# Altium PCB ESP_FINAL.PcbDoc
Units mm, origin at the board's own origin, x right, y up, seen from the top; angles counter-clockwise.
Board outline 63.3 x 39.85 mm, 4 copper layers (L1 (Signal), L2 (GND), L3(3.3V), L4 (Signal)), stack 1.57 mm thick; 68 components, 43 nets, 280 pads, 97 vias.
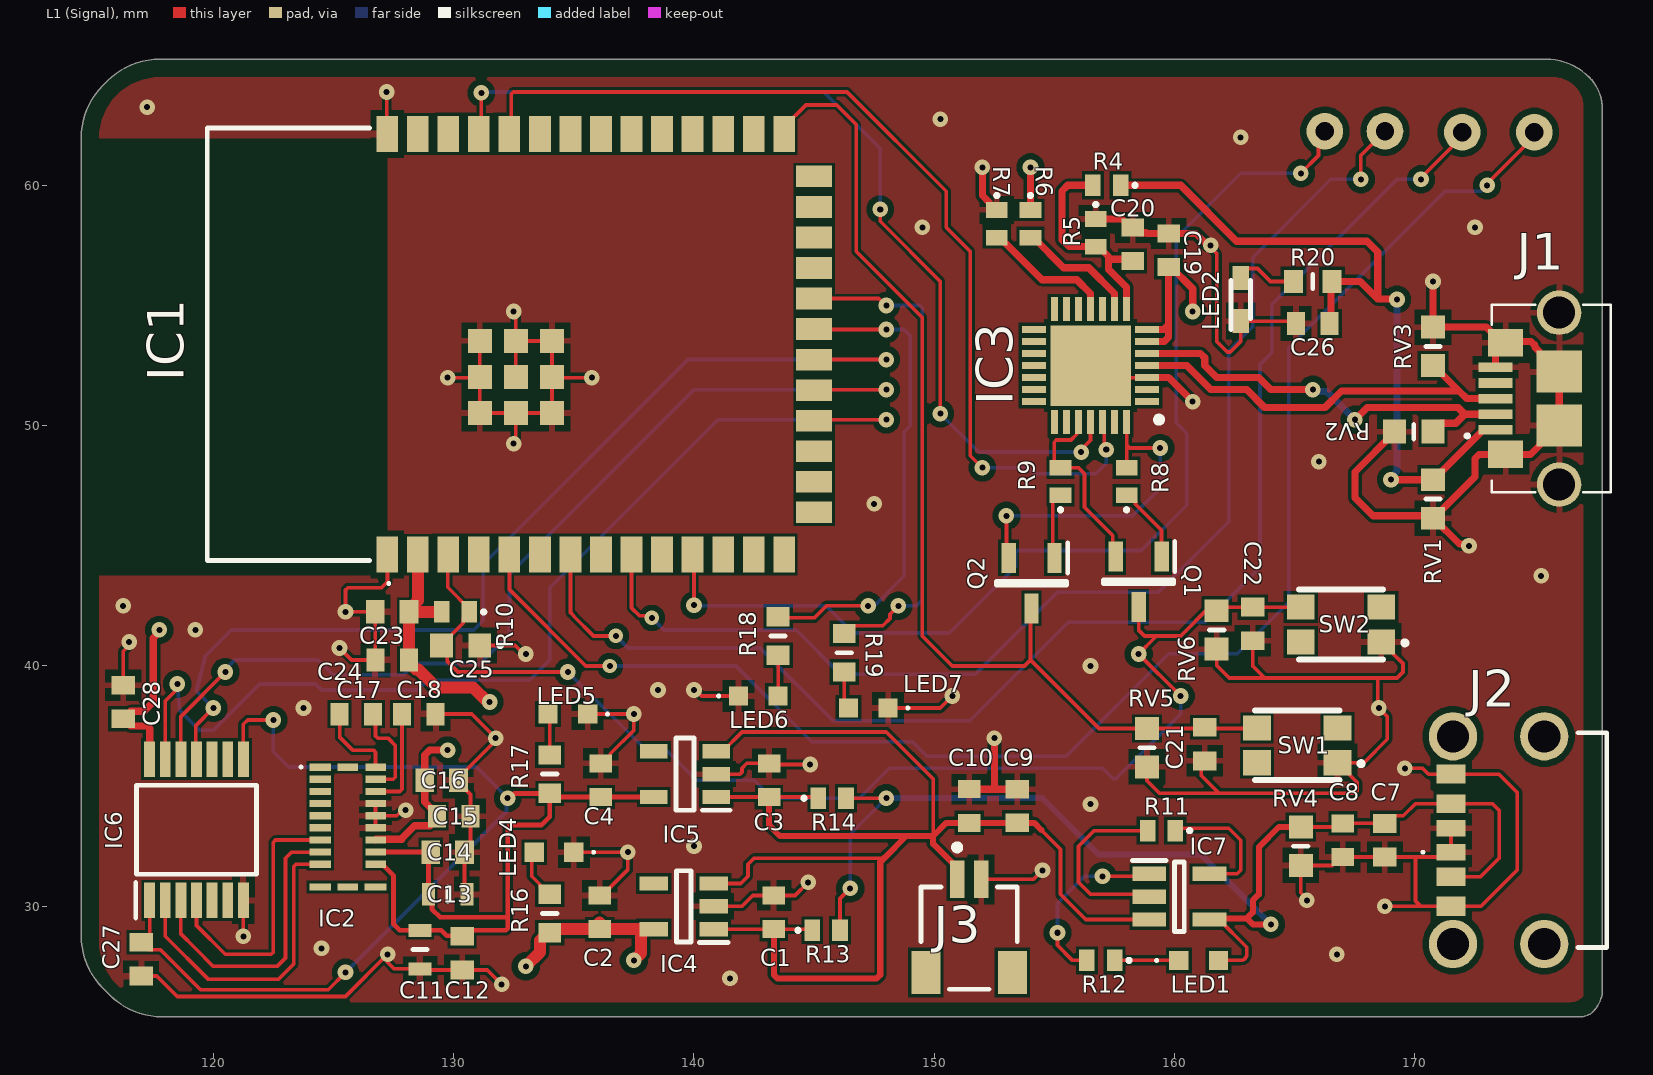
[diagram p0: L1 (Signal) view]
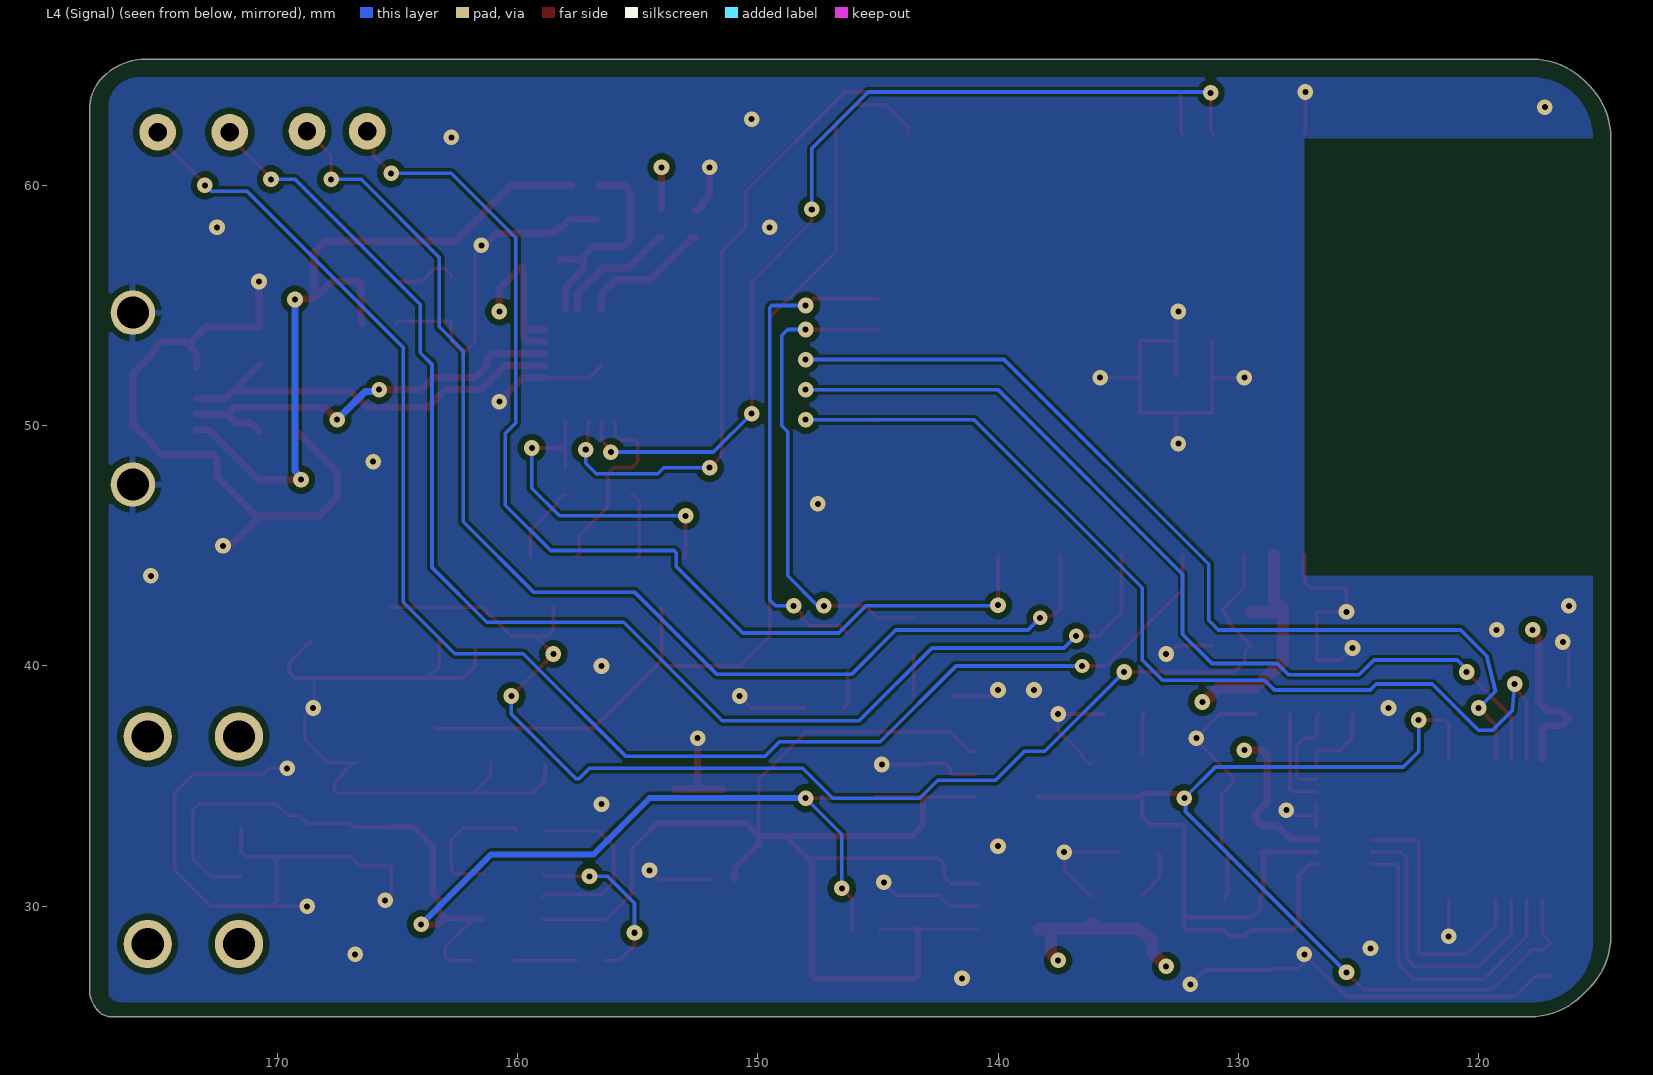
[diagram p1: L4 (Signal) view, seen from below]
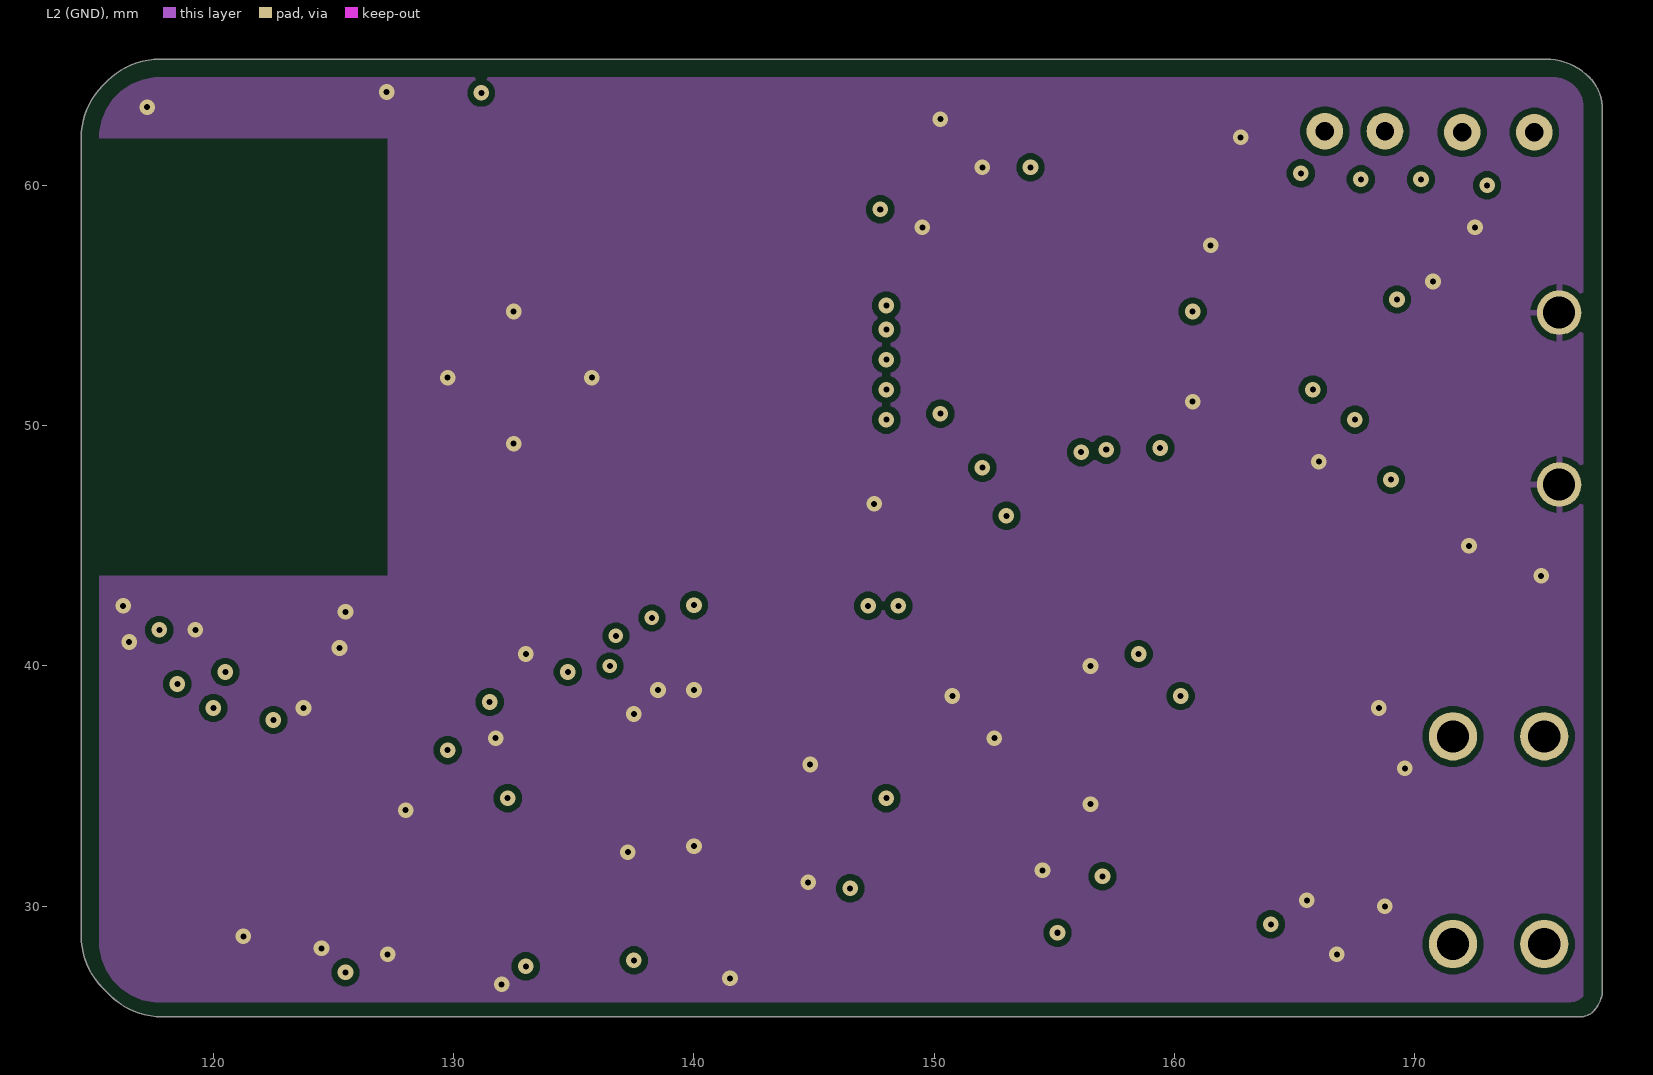
[diagram p2: L2 (GND)]
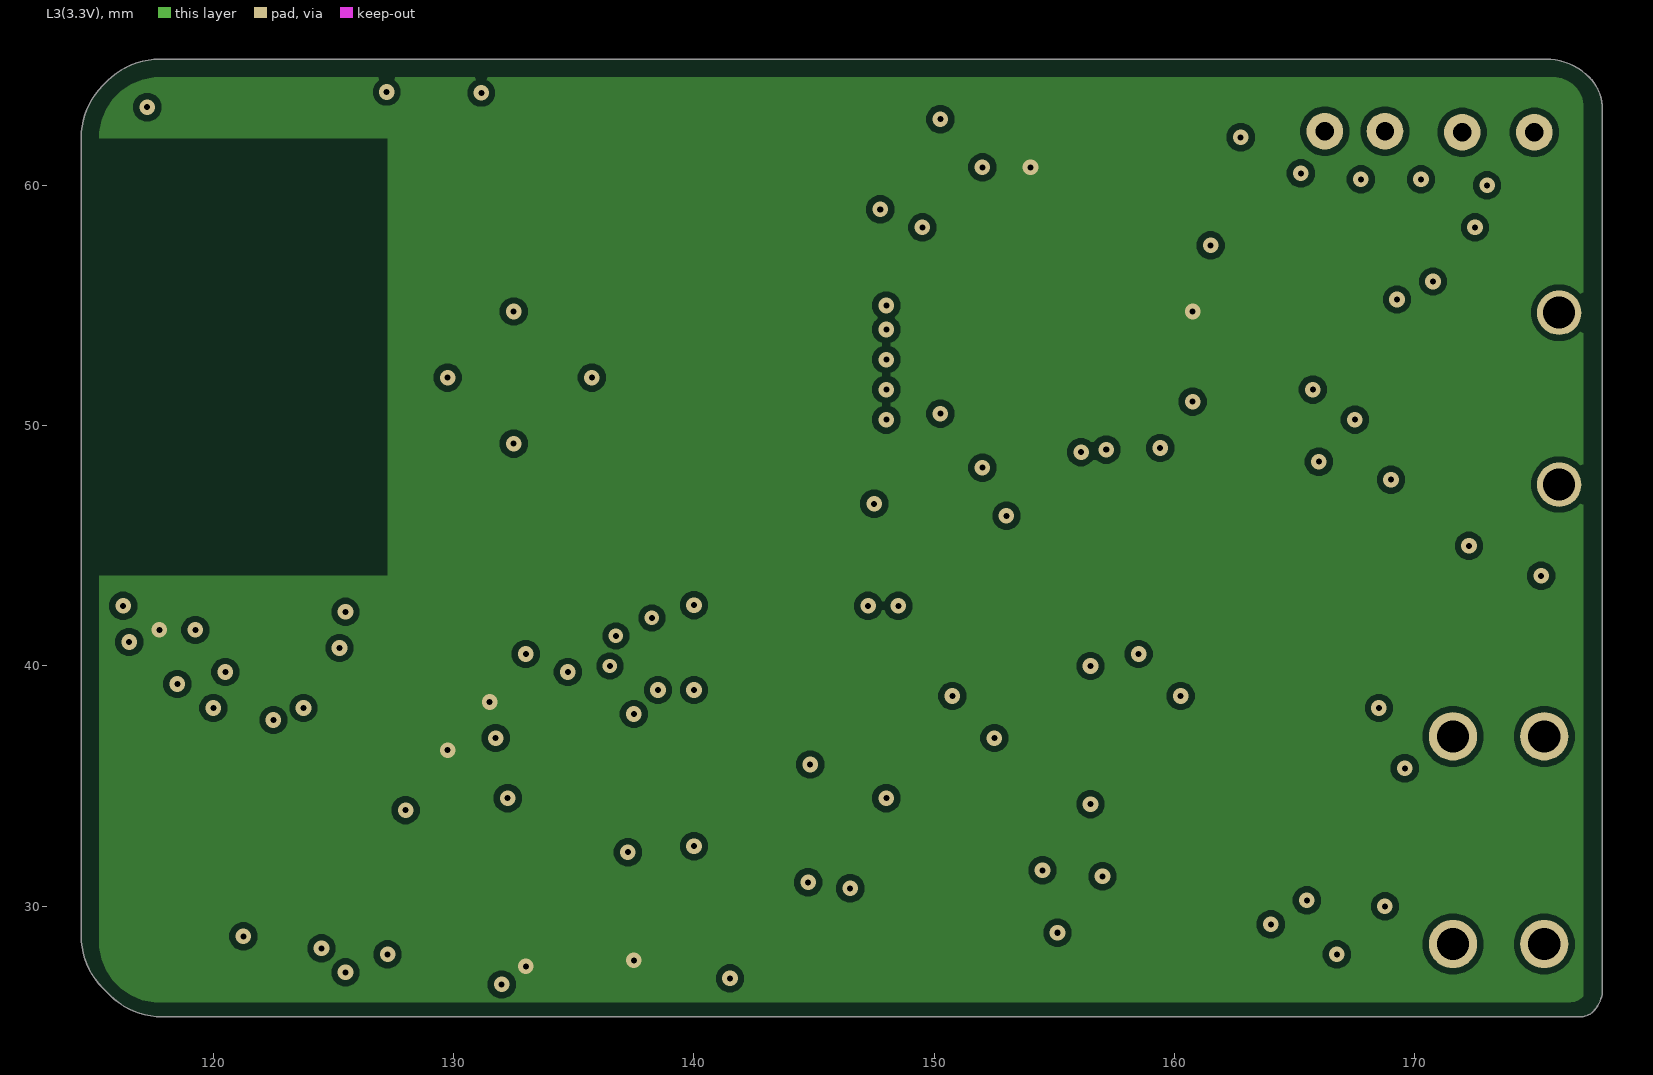
[diagram p3: L3(3.3V)]
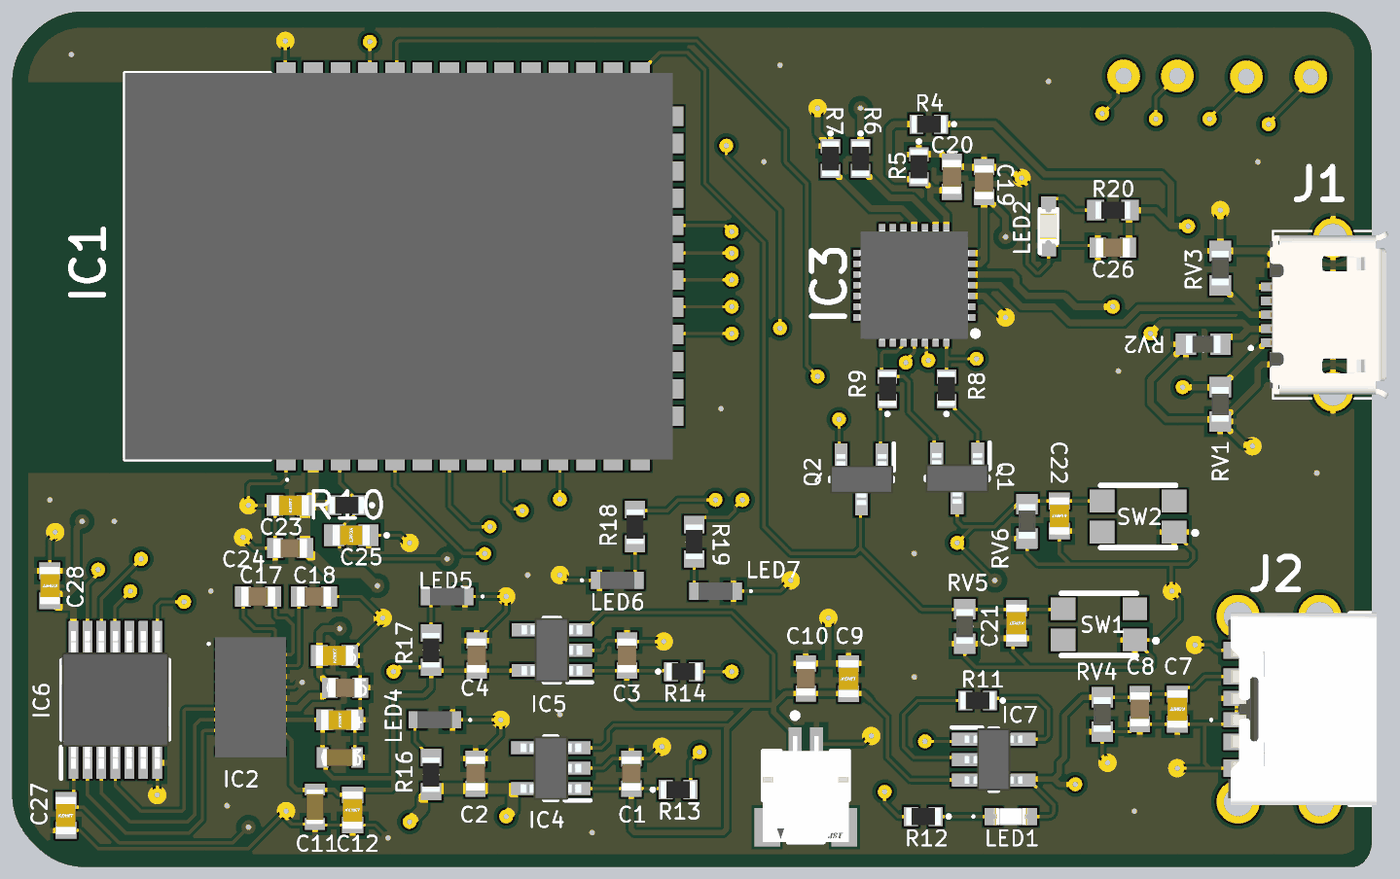
[diagram p4: 3D render of the assembled board from above, using the file's embedded part models]

## Layer stack, top to bottom
Top Solder: solder mask 0.0254, SM-001, Dk 4
L1 (Signal): signal copper 0.035
Dielectric 1: prepreg 0.2, PP-017, Dk 4.6
L2 (GND): signal copper 0.0175
Dielectric 3: core 1.065, Core-039, Dk 4.6
L3(3.3V): signal copper 0.0175
Dielectric 5: prepreg 0.2, PP-017, Dk 4.6
L4 (Signal): signal copper 0.035
Bottom Solder: solder mask 0.0254, SM-001, Dk 4

## Board outline
114.5,28.77 ccw(c117.566,28.77) 115.398,26.602 115.702,26.298 ccw(c117.87,28.466) 117.87,25.4 176.884,25.4 ccw(c176.884,26.151) 177.415,25.62 ccw(c176.485,26.55) 177.8,26.55 177.8,63.172 ccw(c175.922,63.172) 177.25,64.5 ccw(c175.439,62.689) 175.439,65.25 117.77,65.25 ccw(c117.77,62.184) 115.602,64.352 115.398,64.148 ccw(c117.566,61.98) 114.5,61.98

## Design rules (kind name [scope] priority, off if disabled: settings)
Clearance RF_Clearance [InNetClass('RF')] p1: gap=0.254 ignorepadtopadclearanceinfootprint=FALSE except(0: Arc-Hole Track-Hole SMDPad-Hole THPad-Hole Via-Hole Fill-Hole Poly-Hole Region-Hole Text-Hole; 0.127: Arc-Arc Arc-Track Arc-SMDPad Arc-Fill Arc-Region Track-Track Track-SMDPad Track-Fill Track-Region SMDPad-SMDPad SMDPad-THPad SMDPad-Fill SMDPad-Region Fill-Fill Fill-Region Region-Region; 0.33: Arc-THPad Track-THPad; 0.54: THPad-THPad; 0.88: Arc-Poly Track-Poly SMDPad-Poly THPad-Poly Via-Poly Fill-Poly Poly-Poly Poly-Region Poly-Text)
Clearance [All] p2: gap=0.127 ignorepadtopadclearanceinfootprint=FALSE except(0: Arc-Hole Track-Hole SMDPad-Hole THPad-Hole Via-Hole Fill-Hole Poly-Hole Region-Hole Text-Hole; 0.254: Arc-Via Arc-Text Track-Via Track-Text SMDPad-Text THPad-Via THPad-Fill THPad-Poly THPad-Region THPad-Text Via-Via Via-Fill Via-Poly Via-Region Via-Text Fill-Text Poly-Text Region-Text Text-Text; 0.33: Arc-THPad Track-THPad; 0.54: THPad-THPad)
ComponentClearance [All] p1 off: gap=0.254 collisioncheckmode=3 verticalgap=0.254 showdistances=FALSE
DiffPairsRouting [All] p1: maxlimit=0.254 minlimit=0.089 mostfreqgap=0.254 toplayer_prefgap=0.127 toplayer_minwidth=0.089 toplayer_maxwidth=0.381 toplayer_prefwidth=0.127 midlayer1_mingap=0.254 midlayer1_minwidth=0.381 midlayer1_maxwidth=0.381 midlayer1_prefwidth=0.381 midlayer2_mingap=0.254 midlayer2_minwidth=0.381 midlayer2_maxwidth=0.381 midlayer2_prefwidth=0.381 bottomlayer_prefgap=0.127 bottomlayer_minwidth=0.089 bottomlayer_maxwidth=0.381 bottomlayer_prefwidth=0.127 maxuncoupledlength=12.7
HoleSize [All] p1: absolutevalues=TRUE maxlimit=6.35 minlimit=0.02 maxpercent=80.000 minpercent=20.000
MinimumAnnularRing [All] p1: minimumring=0.13
MinimumSolderMaskSliver [All] p1: minsoldermaskwidth=0.2
PlaneConnect [All] p1: planeconnectstyle=Direct reliefexpansion=0.508 reliefentries=4 reliefconductorwidth=0.254 reliefairgap=0.254
PolygonConnect PolygonConnect_Via [IsVia] p1: connectstyle=Direct reliefconductorwidth=0.254 reliefentries=4 polygonreliefangle="90 Angle" airgapwidth=0.254
PolygonConnect [All] p2: connectstyle=Relief reliefconductorwidth=0.254 reliefentries=4 polygonreliefangle="90 Angle" airgapwidth=0.254
RoutingVias [All] p1: holewidth=0.2 width=0.4 viastyle="Through Hole" minholewidth=0.2 minwidth=0.4 maxholewidth=6.3 maxwidth=7
SilkToSilkClearance [All] p1: silktosilkclearance=0.15
SilkToSolderMaskClearance [IsPad] p1: minsilkscreentomaskgap=0.15 clearancetoexposedcopper=TRUE
SolderMaskExpansion [All] p1: expansion=0.102 istentingtop=FALSE
Width [All] p1: maxlimit=2.54 minlimit=0.089 preferedwidth=0.254 toplayer_prefwidth=0.152 midlayer1_minwidth=0.127 midlayer1_maxwidth=1.27 midlayer2_minwidth=0.127 midlayer2_maxwidth=1.27 bottomlayer_prefwidth=0.152 minimp=50.000000 maximp=50.000000 favimp=50.000000
23 further rules are at their usual default settings.

## Classes and differential pairs
differential pair USB_D: +USB_D_P -USB_D_N

## Components (designator, comment, footprint, x,y, rotation, side; value= is the part's Value field where it differs from the comment)
C1 "CGA3E1X7R1C105K080AC" CAPC1608X90N 143.325,29.75 r90 top
C2 "GRM188R71A225KE15J" CAPC1608X90N 136.075,29.75 r270 top
C3 "CGA3E1X7R1C105K080AC" CAPC1608X90N 143.125,35.25 r90 top
C4 "CGA3E1X7R1C105K080AC" CAPC1608X90N 136.125,35.25 r90 top
C7 "C0603C104K8RAC" CAPC1608X95N 168.75,32.75 r90 top
C8 "GRM188R61E106KA73J" CAPC1608X90N 167,32.75 r90 top
C9 "C0603C104K8RAC" CAPC1608X95N 153.45,34.175 r270 top
C10 "GRM188R61E106KA73J" CAPC1608X90N 151.45,34.175 r270 top
C11 "C1608X5R1E475K080AC" CAPC1608X80N 128.6,28.2 r270 top
C12 "C0603C104K8RAC" CAPC1608X95N 130.35,28.05 r270 top
C13 "C1608X5R1E475K080AC" CAPC1608X80N 129.75,30.5 r0 top
C14 "C0603C104K8RAC" CAPC1608X95N 129.75,32.25 r0 top
C15 "GRM188R61E106KA73J" CAPC1608X90N 130,33.75 r0 top
C16 "C0603C104K8RAC" CAPC1608X95N 129.5,35.25 r0 top
C17 "CGA3E1X7R1C105K080AC" CAPC1608X90N 125.95,38 r0 top
C18 "CGA3E1X7R1C105K080AC" CAPC1608X90N 128.55,38 r0 top
C19 "GRM188R61E106MA73J" CAPC1608X90N 159.75,57.3 r270 top
C20 "GRT188R61C105KE13D" CAPC1608X90N 158.25,57.55 r270 top
C21 "C0603C104K5RAC3121" CAPC1608X95N 161.25,36.75 r90 top
C22 "C0603C104K5RAC3121" CAPC1608X95N 163.25,41.75 r90 top
C23 "C0603C104K8RAC" CAPC1608X95N 127.44,42.25 r0 top
C24 "GRM188R61E106KA73J" CAPC1608X90N 127.44,40.25 r0 top
C25 "C0603C105K4RACTU" C0603 130.287,40.85 r180 top
C26 "GRM188R61E106MA73J" CAPC1608X90N 165.75,54.25 r0 top
C27 "C0603C104K8RAC" CAPC1608X95N 117,27.8 r270 top
C28 "C0603C104K8RAC" CAPC1608X95N 116.25,38.5 r90 top
IC1 "ESP32-S3-WROOM-2-N32R8V" ESP32S3WROOM2N32R8V 132.5,53.385 r90 top
IC2 "MAX86150EFF+T" MAX86150EFFT 125.6,33.295 r0 top
IC3 "CP2102N-A02-GQFN28" QFN50P500X500X80-29N-D 156.5,52.5 r180 top
IC4 "AP2112K-3.3TRG1" SOT95P282X130-5N 139.575,30 r180 top
IC5 "AP2112K-1.8TRG1" SOT95P285X140-5N 139.625,35.5 r180 top
IC6 "TXS0104EQPWRQ1" SOP65P640X120-14N 119.3,33.188 r90 top
IC7 "MCP73812T-420I_OT" SOT95P270X145-5N 160.2,30.4 r0 top
J1 "USB3075-30-A" USB307530A 176,51.125 r90 top
J2 "USB4125-GF-A-0190" USB4125GFA0190 174.58,32.75 r90 top
J3 "SM02B-SRSS-TB (LF)(SN)" FP-SM02B-SRSS-TB_LF_SN-MFG 151.45,28.675 r0 top
LED1 "CSL1901UW1" CSL1901UW1 161,27.75 r0 top
LED2 "SMLD12BN1WT86" LEDM168X65N 162.75,55.25 r90 top
LED4 "CSL1901YW1" CSL1901YW1 134.175,32.25 r90 top
LED5 "CSL1901YW1" CSL1901YW1 134.75,38 r90 top
LED6 "CSL1901YW1" CSL1901YW1 142.675,38.75 r270 top
LED7 "CSL1901YW1" CSL1901YW1 147.25,38.25 r90 top
Q1 "KSC3265YMTF" SOT96P237X111-3N 158.5,43.5 r270 top
Q2 "KSC3265YMTF" SOT96P237X111-3N 154.045,43.45 r270 top
R4 "ERJUP3F2212V" ERJUP3 157.175,60 r180 top
R5 "ERJUP3F4752V" ERJUP3 156.718,58.025 r270 top
R6 "ERJUP3F1001V" ERJUP3 154,58.401 r270 top
R7 "ERJ-UP3J103V" ERJUP3 152.6,58.401 r270 top
R8 "ERJ-UP3J103V" ERJUP3 158,47.675 r90 top
R9 "ERJ-UP3J103V" ERJUP3 155.25,47.675 r90 top
R10 "ERJ-UP3J103V" ERJUP3 130.075,42.25 r180 top
R11 "ERJUP3F2001V" ERJUP3 159.45,33.15 r180 top
R12 "ERJUP3F1001V" ERJUP3 156.925,27.75 r180 top
R13 "ERA-3AEB101V" ERJUP3 145.5,29 r0 top
R14 "ERA-3AEB101V" ERJUP3 145.75,34.5 r0 top
R16 "RT0603BRE075KL" RESC1608X55N 134,29.7 r90 top
R17 "RT0603BRE075KL" RESC1608X55N 134,35.5 r90 top
R18 "RT0603BRE075KL" RESC1608X55N 143.5,41.25 r270 top
R19 "RT0603BRE075KL" RESC1608X55N 146.25,40.55 r270 top
R20 "RT0603BRE075KL" RESC1608X55N 165.75,56 r180 top
RV1 "CG0603MLC-05E" VARC1608X55N 170.75,46.95 r90 top
RV2 "CG0603MLC-05E" VARC1608X55N 169.95,49.75 r0 top
RV3 "CG0603MLC-05E" VARC1608X55N 170.75,53.3 r270 top
RV4 "CG0603MLC-05E" VARC1608X55N 165.25,32.5 r90 top
RV5 "CG0603MLC-05E" VARC1608X55N 158.85,36.6 r90 top
RV6 "CG0603MLC-05E" VARC1608X55N 161.75,41.5 r90 top
SW1 "EVP-AA402WL" EVPAA 165.1,36.7 r180 top
SW2 "EVP-AA402WL" EVPAA 166.925,41.725 r180 top

## Footprints (in the part's own frame and the unit in brackets; to place one, negate y for a bottom-side part, rotate by r counter-clockwise, add the part's x,y. Pads: shape width x height; smd on the part's side, far side on the other; paste and mask are expansions set on the pad)
C0603 [mm]
  rect 0.95x1 smd: 1(-0.8,0) 2(0.8,0)
  silkscreen extent -1.7,-0.05 -1.6,0.05, body extent -0.87,-0.48 0.88,0.47, height 0.87
CAPC1608X80N [mm]
  rect 0.54x0.94 smd: 1(-0.8,0) 2(0.8,0)
  silkscreen extent 0,-0.3 0,0.3, body extent -0.8,-0.4 0.8,0.4, height 0.8
CAPC1608X90N [mm]
  rect 0.75x0.94 smd: 1(-0.7,0) 2(0.7,0)
  body extent -0.8,-0.45 0.8,0.45, height 0.8
CAPC1608X95N [mm]
  rect 0.78x0.98 smd: 1(-0.7,0) 2(0.7,0)
  body extent -0.87,-0.48 0.88,0.47, height 0.87
CSL1901UW1 [mm]
  rect 0.8x0.8 smd: 1(-0.825,0) 2(0.825,0)
  silkscreen extent -1.8,-0.05 -1.7,0.05, body extent -0.8,-0.4 0.8,0.4, height 0.55
CSL1901YW1 [mm]
  rect 0.8x0.8 smd: 1(0,-0.825) 2(0,0.825)
  silkscreen extent -0.05,-1.7 0.05,-1.6, body extent -0.4,-0.8 0.4,0.8, height 0.75
ERJUP3 [mm]
  rect 0.65x0.9 smd: 1(-0.575,0) 2(0.575,0)
  silkscreen extent -1.22,-0.05 -1.13,0.05, body extent -0.8,-0.4 0.8,0.4, height 0.55
ESP32S3WROOM2N32R8V [mm]
  rect 1.5x0.9 smd: 1(-8.75,5.26) 2(-8.75,3.99) 3(-8.75,2.72) 4(-8.75,1.45) 5(-8.75,0.18) 6(-8.75,-1.09) 7(-8.75,-2.36) 8(-8.75,-3.63) 9(-8.75,-4.9) 10(-8.75,-6.17) 11(-8.75,-7.44) 12(-8.75,-8.71) 13(-8.75,-9.98) 14(-8.75,-11.25) 27(8.75,-11.25) 28(8.75,-9.98) 29(8.75,-8.71) 30(8.75,-7.44) 31(8.75,-6.17) 32(8.75,-4.9) 33(8.75,-3.63) 34(8.75,-2.36) 35(8.75,-1.09) 36(8.75,0.18) 37(8.75,1.45) 38(8.75,2.72) 39(8.75,3.99) 40(8.75,5.26)
  rect 0.9x1.5 smd: 15(-6.985,-12.5) 16(-5.715,-12.5) 17(-4.445,-12.5) 18(-3.175,-12.5) 19(-1.905,-12.5) 20(-0.635,-12.5) 21(0.635,-12.5) 22(1.905,-12.5) 23(3.175,-12.5) 24(4.445,-12.5) 25(5.715,-12.5) 26(6.985,-12.5)
  rect 1x1 smd: 41(-1.36,-0.09) 42(-1.36,1.41) 43(-2.86,1.41) 44(-2.86,-0.09) 45(-2.86,-1.59) 46(-1.36,-1.59) 47(0.14,-1.59) 48(0.14,-0.09) 49(0.14,1.41)
  silkscreen extent -10,5.15 9,12.75, body extent -9,-12.75 9,12.75, height 3.35
EVPAA [mm]
  rect 1.15x1.05 smd: 1(-1.675,0.725) 2(-1.675,-0.725) 3(1.675,0.725) 4(1.675,-0.725)
  silkscreen extent -2.71,-1.45 1.75,1.45
FP-SM02B-SRSS-TB_LF_SN-MFG [mm]
  rect 0.6x1.55 smd paste+0 mask+0: 1(-0.5,2.45) 2(0.5,2.45)
  rect 1.2x1.8 smd paste+0 mask+0: 3(-1.8,-1.425) 4(1.8,-1.425)
  silkscreen extent -2,-2.12 2,3.9, body extent -2.5,-2.42 2.5,3.32, height 0.25
LEDM168X65N [mm]
  rect 1x0.7 smd: 1(-0.9,0) 2(0.9,0)
  silkscreen extent -1.25,-0.4 0.8,0.4, body extent -0.8,-0.4 0.8,0.4, height 0.55
MAX86150EFFT [mm]
  rect 0.9x0.3 smd: 1(-1.15,2.495) 2(-1.15,1.99) 3(-1.15,1.485) 4(-1.15,0.98) 5(-1.15,0.475) 6(-1.15,-0.03) 7(-1.15,-0.535) 8(-1.15,-1.04) 9(-1.15,-1.545) 10(-1.15,-2.495) 12(1.15,-2.495)
  rect 0.85x0.3 smd: 11(0,-2.495) 13(1.15,-1.545) 14(1.15,-1.04) 15(1.15,-0.535) 16(1.15,-0.03) 17(1.15,0.475) 18(1.15,0.98) 19(1.15,1.485) 20(1.15,1.99) 21(1.15,2.495) 22(0,2.495)
  silkscreen extent -2,2.45 -1.9,2.55, body extent -1.65,-2.8 1.65,2.8, height 1.5
QFN50P500X500X80-29N-D [mm]
  rect 1x0.3 smd: 1(-2.35,1.5) 2(-2.35,1) 3(-2.35,0.5) 4(-2.35,0) 5(-2.35,-0.5) 6(-2.35,-1) 7(-2.35,-1.5) 15(2.35,-1.5) 16(2.35,-1) 17(2.35,-0.5) 18(2.35,0) 19(2.35,0.5) 20(2.35,1) 21(2.35,1.5)
  rect 0.3x1 smd: 8(-1.5,-2.35) 9(-1,-2.35) 10(-0.5,-2.35) 11(0,-2.35) 12(0.5,-2.35) 13(1,-2.35) 14(1.5,-2.35) 22(1.5,2.35) 23(1,2.35) 24(0.5,2.35) 25(0,2.35) 26(-0.5,2.35) 27(-1,2.35) 28(-1.5,2.35)
  rect 3.35x3.35 smd: 29(0,0)
  silkscreen extent -2.98,2.13 -2.73,2.37, body extent -2.55,-2.55 2.55,2.55, height 0.8
RESC1608X55N [mm]
  rect 0.8x0.95 smd: 1(-0.8,0) 2(0.8,0)
  silkscreen extent 0,-0.3 0,0.3, body extent -0.8,-0.4 0.8,0.4, height 0.55
SOP65P640X120-14N [mm]
  rect 1.475x0.45 smd: 1(-2.938,1.95) 2(-2.938,1.3) 3(-2.938,0.65) 4(-2.938,0) 5(-2.938,-0.65) 6(-2.938,-1.3) 7(-2.938,-1.95) 8(2.938,-1.95) 9(2.938,-1.3) 10(2.938,-0.65) 11(2.938,0) 12(2.938,0.65) 13(2.938,1.3) 14(2.938,1.95)
  silkscreen extent -3.67,-2.5 1.85,2.52, body extent -3.21,-2.5 3.21,2.5, height 1
SOT95P270X145-5N [mm]
  rect 1.4x0.6 smd: 1(-1.25,0.95) 2(-1.25,0) 3(-1.25,-0.95) 4(1.25,-0.95) 5(1.25,0.95)
  silkscreen extent -1.95,-1.45 0.2,1.5, body extent -1.35,-1.45 1.35,1.45, height 1.45
SOT95P282X130-5N [mm]
  rect 1.2x0.6 smd: 1(-1.25,0.95) 2(-1.25,0) 3(-1.25,-0.95) 4(1.25,-0.95) 5(1.25,0.95)
  silkscreen extent -1.85,-1.48 0.3,1.5, body extent -1.41,-1.48 1.41,1.48, height 1.3
SOT95P285X140-5N [mm]
  rect 1.15x0.6 smd: 1(-1.3,0.95) 2(-1.3,0) 3(-1.3,-0.95) 4(1.3,-0.95) 5(1.3,0.95)
  silkscreen extent -1.88,-1.5 0.38,1.5, body extent -1.43,-1.5 1.43,1.5, height 1.4
SOT96P237X111-3N [mm]
  rect 1.25x0.6 smd: 1(-1.05,0.955) 2(-1.05,-0.955) 3(1.05,0)
  silkscreen extent -1.68,-1.46 0.08,1.51, body extent -1.18,-1.46 1.18,1.46, height 1.11
USB4125GFA0190 [mm]
  rect 0.7x1.2 smd: A5(-0.5,3.08) B5(0.5,3.08)
  rect 0.76x1.2 smd: A9(1.52,3.08) B9(-1.52,3.08)
  rect 0.8x1.2 smd: A12(2.75,3.08) B12(-2.75,3.08)
  round 2.01 hole 1.34: MH1(-4.32,3) MH2(-4.32,-0.8) MH3(4.32,-0.8) MH4(4.32,3)
  silkscreen extent -4.47,-3.4 4.47,4.3, body extent -4.47,-3.45 4.47,3.45, height 3.26
USB307530A [mm]
  rect 0.4x1.4 smd: 1(-1.3,2.65) 2(-0.65,2.65) 3(0,2.65) 4(0.65,2.65) 5(1.3,2.65)
  round 1.85 hole 1.328: MH1(-3.575,0) MH2(3.575,0)
  rect 1.75x1.9 smd: MP1(-1.125,0) MP2(1.125,0)
  rect 1.15x1.45 smd: MP3(-2.32,2.23) MP4(2.32,2.23)
  silkscreen extent -3.9,-2.15 3.9,3.87, body extent -3.9,-2.6 3.9,2.94, height 2.56
VARC1608X55N [mm]
  rect 0.95x1 smd: 1(-0.8,0) 2(0.8,0)
  silkscreen extent 0,-0.3 0,0.3, body extent -0.8,-0.4 0.8,0.4, height 0.55

## Part data
C1 C3 C4 C17 C18: "Capacitor", Manufacturer_Name=TDK, Mouser Part Number=810-CGA3E1X7R1C105AC, Arrow Part Number=CGA3E1X7R1C105K080AC, Arrow Price/Stock=https://www.arrow.com/en/products/cga3e1x7r1c105k080ac/tdk?region=nac, Datasheet Link=http://docs-europe.electrocomponents.com/webdocs/14e9/0900766b814e9125.pdf, Height=0.9mm, Manufacturer_Part_Number=CGA3E1X7R1C105K080AC, Mouser Price/Stock=https://www.mouser.co.uk/ProductDetail/TDK/CGA3E1X7R1C105K080AC?qs=XHchNesRtUbBVNsGg9%252BP9g%3D%3D
C2: "Capacitor", Manufacturer_Name="Murata Electronics", Mouser Part Number=81-GRM188R71A225KE5J, Arrow Part Number=GRM188R71A225KE15J, Arrow Price/Stock=https://www.arrow.com/en/products/grm188r71a225ke15j/murata-manufacturing?region=nac, Datasheet Link=https://psearch.en.murata.com/capacitor/product/GRM188R71A225KE15%23.html, Height=0.9mm, Manufacturer_Part_Number=GRM188R71A225KE15J, Mouser Price/Stock=https://www.mouser.co.uk/ProductDetail/Murata-Electronics/GRM188R71A225KE15J?qs=UOvNgVTuGCp28jccFPFZuA%3D%3D
C7 C9 C12 C14 C16 C23 C27 C28: "Capacitor", Manufacturer_Name=KEMET, Mouser Part Number=80-C0603C104K8RAC, Arrow Part Number=C0603C104K8RAC, Arrow Price/Stock=https://www.arrow.com/en/products/c0603c104k8rac/kemet-corporation?region=nac, Datasheet Link=https://www.kemet.com/specsheet/C0603C104K8RAC%7BBULK%7D, Height=0.95mm, Manufacturer_Part_Number=C0603C104K8RAC, Mouser Price/Stock=https://www.mouser.co.uk/ProductDetail/KEMET/C0603C104K8RAC?qs=JxH5GSBHSCStdUs4AtW0Gg%3D%3D
C8 C10 C15 C24: "Capacitor", Manufacturer_Name="Murata Electronics", Mouser Part Number=81-GRM188R61E106KA3J, Arrow Part Number=GRM188R61E106KA73J, Arrow Price/Stock=https://www.arrow.com/en/products/grm188r61e106ka73j/murata-manufacturing?region=nac, Height=0.9mm, Manufacturer_Part_Number=GRM188R61E106KA73J, Mouser Price/Stock=https://www.mouser.co.uk/ProductDetail/Murata-Electronics/GRM188R61E106KA73J?qs=5aG0NVq1C4xEV8YyiSS7mg%3D%3D
C11 C13: "Capacitor", Manufacturer_Name=TDK, Mouser Part Number=810-C1608X5R1E475K, Arrow Part Number=C1608X5R1E475K080AC, Arrow Price/Stock=https://www.arrow.com/en/products/c1608x5r1e475k080ac/tdk?region=nac, Datasheet Link=https://product.tdk.com/info/en/catalog/datasheets/mlcc_commercial_midvoltage_en.pdf, Height=0.8mm, Manufacturer_Part_Number=C1608X5R1E475K080AC, Mouser Price/Stock=https://www.mouser.co.uk/ProductDetail/TDK/C1608X5R1E475K080AC?qs=dfay7wIA1uHUGZGvnFtOyQ%3D%3D
C19 C26: "Capacitor", Manufacturer_Name="Murata Electronics", Mouser Part Number=81-GRM188R61E106MA3J, Arrow Part Number=GRM188R61E106MA73J, Arrow Price/Stock=https://www.arrow.com/en/products/grm188r61e106ma73j/murata-manufacturing?region=nac, Datasheet Link=https://psearch.en.murata.com/capacitor/product/GRM188R61E106MA73%23.html, Height=0.9mm, Manufacturer_Part_Number=GRM188R61E106MA73J, Mouser Price/Stock=https://www.mouser.co.uk/ProductDetail/Murata-Electronics/GRM188R61E106MA73J?qs=hNud%2FORuBR2%252B%252BY67hhW1nA%3D%3D
C20: "Capacitor", Manufacturer_Name="Murata Electronics", Mouser Part Number=81-GRT188R61C105KE3D, Arrow Part Number=GRT188R61C105KE13D, Arrow Price/Stock=https://www.arrow.com/en/products/grt188r61c105ke13d/murata-manufacturing, Datasheet Link=https://psearch.en.murata.com/capacitor/product/GRT188R61C105KE13%23.html?excid=ww_pa-o_ow_ctl_c03e-9_2017, Height=0.9mm, Manufacturer_Part_Number=GRT188R61C105KE13D, Mouser Price/Stock=https://www.mouser.co.uk/ProductDetail/Murata-Electronics/GRT188R61C105KE13D?qs=drgMNd%252BkGPOepOW7YqGRfg%3D%3D
C21 C22: "Capacitor", Manufacturer_Name=KEMET, Mouser Part Number=80-C603C104K5RAC3121, Arrow Part Number=C0603C104K5RAC3121, Arrow Price/Stock=https://www.arrow.com/en/products/c0603c104k5rac3121/kemet-corporation?region=nac, Datasheet Link=https://mouser.componentsearchengine.com/Datasheets/1/C0603C104K5RAC3121.pdf, Height=0.95mm, Manufacturer_Part_Number=C0603C104K5RAC3121, Mouser Price/Stock=https://www.mouser.co.uk/ProductDetail/KEMET/C0603C104K5RAC3121?qs=oBCMsStVSxe1EkGyoyETtg%3D%3D
C25: "Capacitor", Manufacturer_Name=KEMET, Mouser Part Number=80-C0603C105K4R, Arrow Part Number=C0603C105K4RACTU, Arrow Price/Stock=https://www.arrow.com/en/products/c0603c105k4ractu/kemet-corporation?region=nac, Datasheet Link=https://content.kemet.com/datasheets/KEM_C1002_X7R_SMD.pdf, Height=0.87mm, Manufacturer_Part_Number=C0603C105K4RACTU, Mouser Price/Stock=https://www.mouser.co.uk/ProductDetail/KEMET/C0603C105K4RACTU?qs=STjISULpmtZNMAZGR4X39Q%3D%3D
IC1: "Integrated Circuit", Manufacturer_Name="Espressif Systems", Mouser Part Number=356-ESP3S3WRM2N32R8V, Datasheet Link=https://www.espressif.com/sites/default/files/documentation/esp32-s3-wroom-2_datasheet_en.pdf, Height=3.25mm, Manufacturer_Part_Number=ESP32-S3-WROOM-2-N32R8V, Mouser Price/Stock=https://www.mouser.co.uk/ProductDetail/Espressif-Systems/ESP32-S3-WROOM-2-N32R8V?qs=Li%252BoUPsLEntC3FaT%2FvCeug%3D%3D
IC2: "Integrated Circuit", Manufacturer_Name="Analog Devices", Mouser Part Number=700-MAX86150EFF+T, Arrow Part Number=MAX86150EFF+T, Arrow Price/Stock=https://www.arrow.com/en/products/max86150efft/maxim-integrated?region=nac, Datasheet Link=https://datasheets.maximintegrated.com/en/ds/MAX86150.pdf, Height=1.4mm, Manufacturer_Part_Number=MAX86150EFF+T, Mouser Price/Stock=https://www.mouser.co.uk/ProductDetail/Analog-Devices-Maxim-Integrated/MAX86150EFF%2bT?qs=CfuTe0PnivoQJnGe4c6AkQ%3D%3D
IC3: "Integrated Circuit", Manufacturer_Name="Silicon Labs", Mouser Part Number=634-CP2102NA02GQFN28, Arrow Part Number=CP2102N-A02-GQFN28, Arrow Price/Stock=https://www.arrow.com/en/products/cp2102n-a02-gqfn28/silicon-labs?region=nac, Datasheet Link=https://componentsearchengine.com/Datasheets/2/CP2102N-A02-GQFN28.pdf, Height=0.8mm, Manufacturer_Part_Number=CP2102N-A02-GQFN28, Mouser Price/Stock=https://www.mouser.co.uk/ProductDetail/Silicon-Labs/CP2102N-A02-GQFN28?qs=u16ybLDytRaSBkSkyjYFiA%3D%3D
IC4: "Integrated Circuit", Manufacturer_Name="Diodes Inc.", Mouser Part Number=621-AP2112K-3.3TRG1, Arrow Part Number=AP2112K-3.3TRG1, Arrow Price/Stock=https://www.arrow.com/en/products/ap2112k-3.3trg1/diodes-incorporated?region=nac, Datasheet Link=http://uk.rs-online.com/web/p/products/8283509, Height=1.3mm, Manufacturer_Part_Number=AP2112K-3.3TRG1, Mouser Price/Stock=https://www.mouser.co.uk/ProductDetail/Diodes-Incorporated/AP2112K-3.3TRG1?qs=x6A8l6qLYDDPYHosCdzh%2FA%3D%3D
IC5: "Integrated Circuit", Manufacturer_Name="Diodes Inc.", Mouser Part Number=621-AP2112K-1.8TRG1, Arrow Part Number=AP2112K-1.8TRG1, Arrow Price/Stock=https://www.arrow.com/en/products/ap2112k-1.8trg1/diodes-incorporated?region=nac, Datasheet Link=https://www.diodes.com/assets/Datasheets/AP2112.pdf, Height=1.4mm, Manufacturer_Part_Number=AP2112K-1.8TRG1, Mouser Price/Stock=https://www.mouser.co.uk/ProductDetail/Diodes-Incorporated/AP2112K-1.8TRG1?qs=x6A8l6qLYDBx1xhw8AX2cw%3D%3D
IC6: "Integrated Circuit", Manufacturer_Name="Texas Instruments", Mouser Part Number=595-TXS0104EQPWRQ1, Arrow Part Number=TXS0104EQPWRQ1, Arrow Price/Stock=https://www.arrow.com/en/products/txs0104eqpwrq1/texas-instruments?region=nac, Datasheet Link=http://www.ti.com/lit/gpn/txs0104e-q1, Height=1.2mm, Manufacturer_Part_Number=TXS0104EQPWRQ1, Mouser Price/Stock=https://www.mouser.co.uk/ProductDetail/Texas-Instruments/TXS0104EQPWRQ1?qs=%2Fd%252BFzHvH4c2rOFEu5n8Xkg%3D%3D
IC7: "Integrated Circuit", Arrow Part Number=MCP73812T-420I/OT, Manufacturer_Name=Microchip, Mouser Part Number=579-MCP73812T-420IOT, Arrow Price/Stock=https://www.arrow.com/en/products/mcp73812t-420iot/microchip-technology?region=nac, Datasheet Link=https://datasheet.datasheetarchive.com/originals/distributors/SFDatasheet-4/sf-00090104.pdf, Height=1.45mm, Manufacturer_Part_Number=MCP73812T-420I/OT, Mouser Price/Stock=https://www.mouser.co.uk/ProductDetail/Microchip-Technology/MCP73812T-420I-OT?qs=tZia49mH7IIojPkz8UZ7Mg%3D%3D
J1: "Connector", Manufacturer_Name="GCT (GLOBAL CONNECTOR TECHNOLOGY)", Mouser Part Number=640-USB3075-30-A, Datasheet Link=https://componentsearchengine.com/Datasheets/2/USB3075-30-A.pdf, Height=2.7mm, Manufacturer_Part_Number=USB3075-30-A, Mouser Price/Stock=https://www.mouser.co.uk/ProductDetail/GCT/USB3075-30-A?qs=KUoIvG%2F9IlbGMJplbp1ybA%3D%3D
J2: "Connector", Manufacturer_Name="GCT (GLOBAL CONNECTOR TECHNOLOGY)", Mouser Part Number=640-USB4125-GF-A-190, Datasheet Link=https://eu.mouser.com/datasheet/2/837/usb4125-2448699.pdf, Manufacturer_Part_Number=USB4125-GF-A-0190, Mouser Price/Stock=https://www.mouser.co.uk/ProductDetail/GCT/USB4125-GF-A-0190?qs=QNEnbhJQKvbCz4hEJBS24w%3D%3D
J3: library part CMP-17439-000368-1, "CONN HEADER SMD R/A 2POS 1MM", Color=Natural, Contact Resistance=40mR, Current Rating=700mA, Flammability Rating="UL94 V-0", Housing Color=Beige, Insulation Resistance=100MR, Max Current Rating=1A, Max Operating Temperature=85°C, Max Voltage Rating (AC)=50V, Min Operating Temperature=-25°C, Connector Type=Header, Contact Finish - Mating=TIN, Contact Material="Copper Alloy", Contact Plating=Tin, Contact Shape=Square, Contact Type="Male Pin", Depth=4.95mm, Fastening Type=Pull, Housing Material=Polyamide, Insulation Color=Natural, Insulation Material=Nylon, Lead Free="Lead Free", Lead Pitch=1mm, Length=4mm, Material=Polyamide, Mount="Surface Mount", Number of Contacts=2, Number of Positions=2, Number of Rows=1, Orientation="Right Angle", Packaging="Tape and Reel", Pitch=1mm, REACH SVHC="No SVHC", Series=SR, Termination=Solder, Voltage Rating=50V, Voltage Rating (AC)=50V
LED1: "LED", Manufacturer_Name="ROHM Semiconductor", Mouser Part Number=755-CSL1901UW1, Datasheet Link=https://www.mouser.kr/datasheet/2/348/csl1901uw1_e-3006038.pdf, Height=0.65mm, Manufacturer_Part_Number=CSL1901UW1, Mouser Price/Stock=https://www.mouser.co.uk/ProductDetail/ROHM-Semiconductor/CSL1901UW1?qs=vvQtp7zwQdNEDNe2oY5WlQ%3D%3D
LED2: "LED", Manufacturer_Name="ROHM Semiconductor", Mouser Part Number=755-SMLD12BN1WT86, Datasheet Link=https://datasheet.datasheetarchive.com/originals/distributors/Datasheets_SAMA/8f824a900f8c9a143b1c3640e6aee7b7.pdf, Height=0.65mm, Manufacturer_Part_Number=SMLD12BN1WT86, Mouser Price/Stock=https://www.mouser.co.uk/ProductDetail/ROHM-Semiconductor/SMLD12BN1WT86?qs=qSfuJ%252Bfl%2Fd43hcPp9hYPwA%3D%3D
LED4 LED5 LED6 LED7: "LED", Manufacturer_Name="ROHM Semiconductor", Mouser Part Number=755-CSL1901YW1, Datasheet Link=https://www.rohm.com/datasheet?p=CSL1901YW&dist=Digi-key&media=referral&source=digi-key.com&campaign=Digi-key, Height=0.65mm, Manufacturer_Part_Number=CSL1901YW1, Mouser Price/Stock=https://www.mouser.co.uk/ProductDetail/ROHM-Semiconductor/CSL1901YW1?qs=vvQtp7zwQdO0NUeC1uqWRA%3D%3D
Q1 Q2: "Transistor BJT NPN", Manufacturer_Name=onsemi, Mouser Part Number=512-KSC3265YMTF, Arrow Part Number=KSC3265YMTF, Arrow Price/Stock=https://www.arrow.com/en/products/ksc3265ymtf/on-semiconductor?region=europe, Datasheet Link=https://www.onsemi.com/pdf/datasheet/ksc3265-d.pdf, Height=1.11mm, Manufacturer_Part_Number=KSC3265YMTF, Mouser Price/Stock=https://www.mouser.co.uk/ProductDetail/onsemi-Fairchild/KSC3265YMTF?qs=ljbEvF4DwONyf%2FfRDGs9vw%3D%3D
R4 R5 R6 R11 R12: "Resistor", Manufacturer_Name=Panasonic, Datasheet Link=https://industrial.panasonic.com/cdbs/wwwdata/pdf/RDP0000/AOA0000C337.pdf, Height=0.55mm
  R4: Manufacturer_Part_Number=ERJUP3F2212V
  R5: Manufacturer_Part_Number=ERJUP3F4752V
  R6 R12: Manufacturer_Part_Number=ERJUP3F1001V
  R11: Manufacturer_Part_Number=ERJUP3F2001V
R7 R8 R9 R10: "Resistor", Manufacturer_Name=Panasonic, Mouser Part Number=667-ERJ-UP3J103V, Arrow Part Number=ERJ-UP3J103V, Arrow Price/Stock=https://www.arrow.com/en/products/erj-up3j103v/panasonic?region=nac, Datasheet Link=https://industrial.panasonic.com/cdbs/www-data/pdf/RDP0000/AOA0000C337.pdf, Height=0.55mm, Manufacturer_Part_Number=ERJ-UP3J103V, Mouser Price/Stock=https://www.mouser.co.uk/ProductDetail/Panasonic/ERJ-UP3J103V?qs=GedFDFLaBXEhCQ7XYsRS5A%3D%3D
R13 R14: "Resistor", Manufacturer_Name=Panasonic, Mouser Part Number=667-ERA-3AEB101V, Arrow Part Number=ERA-3AEB101V, Arrow Price/Stock=https://www.arrow.com/en/products/era3aeb101v/panasonic?region=nac, Datasheet Link=https://industrial.panasonic.com/cdbs/www-data/pdf/RDM0000/AOA0000C307.pdf, Height=0.55mm, Manufacturer_Part_Number=ERA-3AEB101V, Mouser Price/Stock=https://www.mouser.co.uk/ProductDetail/Panasonic/ERA-3AEB101V?qs=1VWA5LkbEaor%2FEcdBRYgKw%3D%3D
R16 R17 R18 R19 R20: "Resistor", Manufacturer_Name=KEMET, Mouser Part Number=603-RT0603BRE075KL, Arrow Part Number=RT0603BRE075KL, Arrow Price/Stock=https://www.arrow.com/en/products/rt0603bre075kl/yageo?region=nac, Datasheet Link=https://datasheet.datasheetarchive.com/originals/distributors/Datasheets_SAMA/a1f8f48f216d234b3e6a96d43a77a0c1.pdf, Height=0.55mm, Manufacturer_Part_Number=RT0603BRE075KL, Mouser Price/Stock=https://www.mouser.co.uk/ProductDetail/YAGEO/RT0603BRE075KL?qs=acBVhj9v9XV8K9glB49uvw%3D%3D
RV1 RV2 RV3 RV4 RV5 RV6: "Varistor", Manufacturer_Name=Bourns, Mouser Part Number=652-CG0603MLC-05E, Arrow Part Number=CG0603MLC-05E, Arrow Price/Stock=https://www.arrow.com/en/products/cg0603mlc-05e/bourns?region=nac, Datasheet Link=http://www.farnell.com/datasheets/1785244.pdf, Height=0.55mm, Manufacturer_Part_Number=CG0603MLC-05E, Mouser Price/Stock=https://www.mouser.co.uk/ProductDetail/Bourns/CG0603MLC-05E?qs=lDok7oSghXVLNKMK69q%252BFQ%3D%3D
SW1 SW2: "Switch", Manufacturer_Name=Panasonic, Datasheet Link=http://www.farnell.com/datasheets/2609096.pdf?_ga=2.89858395.1909122740.1531313473-167411096.1502103357, Manufacturer_Part_Number=EVP-AA402WL

## Free pads (board coordinates)
  round 1.524 hole 0.762: 2(166.25,62.25) 3(168.75,62.25) 4(171.966,62.207) 5(174.966,62.207)

## Via types
v1: diameter 0.65, hole 0.25, L1 (Signal) to L4 (Signal), 66 vias
v2: diameter 0.65, hole 0.25, L1 (Signal) to L4 (Signal), tented top, 28 vias
v3: diameter 0.6, hole 0.25, L1 (Signal) to L4 (Signal), 3 vias

## Nets (pads, with @x,y where several pads share a name; then routed paths per layer and width w, separated by ;. In a path a pad name is that pad's centre, name@x,y a point inside that pad or via, vN(x,y) a via of type N, cw(c..) or ccw(c..) an arc to the next point about the centre after c; other vN are vias at no path point)
+1.8V: C4.1 C11.1 C12.1 C13.1 C14.1 C27.1 IC2.13 IC2.14 IC5.5 IC6.1 IC6.8 R17.1 | length 65.7
  L1 (Signal) w0.152: IC6.1 117.358,30.242 117.358,28.814 117.044,28.5 C27.1 117.314,28.186 117.814,28.186 119.471,26.529 124.779,26.529 v2(125.5,27.25) ; IC6.8 121.25,37.571 121.429,37.75 v1(122.5,37.75)
  L1 (Signal) w0.2: IC2.13 127.025,31.75 127.5,31.275 127.5,29.25 127.75,29 C11.1 129.485,29 129.71,28.775 130.325,28.775 C12.1 130.6,29 132.161,29 132.25,29.089 132.25,29.543 ; IC2.14 C14.1@129.045,32.255 ; C14.1 128.95,32.15 C13.1 129.097,30.353 129.097,29.883 129.437,29.543 130.48,29.543 132.25,29.543 ; v1(132.25,34.5) 132.317,34.5 132.517,34.7 R17.1 ; IC5.5 C4.1 134.15,34.55 R17.1 ; 132.25,29.543 132.25,33.298 132.339,33.388 133.666,33.388 134,33.721 R17.1
  L4 (Signal) w0.152: v1(122.5,37.75) 122.5,36.432 123.137,35.795 130.955,35.795 v1(132.25,34.5) 132.196,34.446 132.196,33.946 v2(125.5,27.25)
+3.3V: C2.2 C15.1 C16.1 C19.2 C23.2 C24.2 C28.1 IC1.2 IC2.15 IC3.6 IC3.7 IC4.5 IC6.14 R6.1 R10.2 R16.1 | length 40.9
  L1 (Signal) w0.3: IC6.14 117.35,37.4 117.25,37.5 116.55,37.5 C28.1 116.564,38.114 117.114,38.114 117.5,38.5 117.5,41.162 117.75,41.412 v2(117.75,41.5) ; IC2.15 126.781,32.791 127.85,32.791 127.85,32.831 128.375,33.356 129.001,33.356 129.3,33.655 C15.1 129.3,33.845 128.8,34.345 C16.1 128.8,36.3 129,36.5 v2(129.75,36.5) ; R6.1 v2(154,60.75) ; IC3.6 159.566,53.5 159.75,53.684 159.75,54.205 ; IC3.7 159.545,54 159.75,54.205 ; C19.2@159.75,56.3 159.75,54.205 ; C19.2 159.845,56.6 160.75,55.695 v2(160.75,54.75)
  L1 (Signal) w0.5: IC1.2 128.51,42.72 128.14,42.35 C23.2 ; R10.2 C23.2 ; v2(131.5,38.5) 131.412,38.5 130.812,39.1 129.29,39.1 128.534,39.856 128.439,39.856 128.14,40.155 C24.2 C23.2 ; v1(133,27.5) 133.601,28.101 133.601,28.576 133.925,28.9 R16.1 134.15,29.05 C2.2 136.075,29.318 136.343,29.05 IC4.5@138.025,29.05 ; v1(137.5,27.75) 137.5,27.754 137.801,28.055 137.801,28.826 IC4.5@138.025,29.05 ; IC4.5 IC4.5@138.025,29.05
+5V_CHARGING: C7.2 C8.2 IC7.4 J2.A9 J2.B9 LED1.2 R13.2 R14.2 RV4.2 | length 50.8
  L1 (Signal) w0.152: R13.2 146.075,30.325 v1(146.5,30.75) ; R14.2 v1(148,34.5) ; IC7.4 161.85,29.45 163,28.3 163,28 cw(c162.75,28) 162.75,27.75 LED1.2 ; RV4.2 166.85,33.3 C8.2 C7.2 169.064,33.764 169.514,33.764 170.02,34.27 J2.A9 173.23,34.27 173.5,34 173.5,32 172.73,31.23 J2.B9
  L1 (Signal) w0.25: IC7.4 161.5,29.5 163,29.5 ; v1(164,29.25) 163.25,29.25 163,29.5 ; RV4.2 164.339,33.3 163.5,32.461 163.5,30.5 163.25,30.25 163.25,29.75 163,29.5
  L4 (Signal) w0.152: v1(146.5,30.75) 146.5,33 v1(148,34.5)
  L4 (Signal) w0.25: v1(148,34.5) 154.5,34.5 156.85,32.15 161.1,32.15 v1(164,29.25)
BATTERY: C1.1 C3.1 C9.2 C10.2 IC4.1 IC4.3 IC5.1 IC5.3 IC7.3 J3.1 R13.1 R14.1 | length 64
  L1 (Signal) w0.152: IC4.1 C1.1 144.875,29.05 R13.1 ; IC4.3 141.95,30.95 142.25,31.25 142.25,31.75 142.5,32 147.913,32 147.934,32.022 ; IC5.1 C3.1 145.125,34.55 R14.1 ; IC5.3 141.2,36.45 142,37.25 148,37.25 149.95,35.3 149.95,32.925 ; 154.45,33.175 155.25,32.375 155.25,30.5 156.3,29.45 IC7.3
  L1 (Signal) w0.25: C3.1 143.125,33.375 143.575,32.925 148.838,32.925 ; C1.1 143.325,27.146 143.471,27 147.604,27 147.75,27.146 147.75,31.837 147.913,32 ; 147.934,32.022 148.838,32.925 ; J3.1@151.062,31.237 J3.1 150.95,31.6 149.95,32.6 149.95,32.925 ; 154.45,33.175 154.15,33.475 C9.2 C10.2 150.5,33.475 149.95,32.925 ; 148.838,32.925 149.95,32.925
CHIP_PU: C22.2 C25.2 IC1.3 Q1.3 R10.1 RV6.2 SW2.4 | length 52.6
  L1 (Signal) w0.152: IC1.3 129.75,44.605 129.75,43.275 130.65,42.375 R10.1 130.401,42.001 130.401,41.789 129.487,40.875 C25.2 129.74,40.597 129.74,40.189 130.179,39.75 v2(134.75,39.75) ; Q1.3 158.5,41.5 158.75,41.25 159.172,41.25 ; v2(160.25,38.75) v1(158.5,40.5) 159.172,41.172 159.172,41.25 ; SW2.4 C22.2 161.45,42.45 160.25,41.25 159.172,41.25
  L4 (Signal) w0.152: v2(134.75,39.75) 138.05,36.45 138.9,36.45 140.1,35.25 142.505,35.25 143.255,34.5 146.875,34.5 148.125,35.75 157,35.75 157.437,35.313 157.563,35.313 160.25,38 v2(160.25,38.75)
DTR: IC3.28 Q2.2 R8.2 | length 13.7
  L1 (Signal) w0.152: v1(153,46.25) 153,44.59 Q2.2 ; R8.2 158,49.2 ; IC3.28 158,49.2 ; v1(159.4,49.072) 158.128,49.072 158,49.2
  L4 (Signal) w0.152: v1(153,46.25) 158.25,46.25 159.4,47.4 v1(159.4,49.072)
GND: C1.2 C2.1 C3.2 C4.2 C7.1 C8.1 C9.1 C10.1 C11.2 C12.2 C13.2 C14.2 C15.2 C16.2 C18.2 C19.1 C20.1 C21.1 C22.1 C23.1 C24.1 C25.1 C26.1 C27.2 C28.2 IC1.1 IC1.40 IC1.41 IC1.42 IC1.43 IC1.44 IC1.45 IC1.46 IC1.47 IC1.48 IC1.49 IC2.16 IC2.17 IC2.18 IC3.3 IC3.29 IC4.2 IC5.2 IC6.7 J1.5 J1.MH1 J1.MH2 J1.MP1 J1.MP2 J1.MP3 J1.MP4 J2.A5 J2.A12 J2.B5 J2.B12 J3.2 LED2.1 LED4.1 LED5.1 LED6.1 LED7.1 R5.1 R7.1 RV1.1 RV2.1 RV3.1 RV4.1 RV5.1 RV6.1 SW1.1 SW2.1 | length 197.3
  L1 (Signal) w0.152: C28.2 116.25,40.615 116.5,40.865 v1(116.5,41) ; C27.2 117.65,27.1 118.5,26.25 125.5,26.25 v1(127.25,28) 127.25,27.667 127.517,27.4 C11.2 128.65,27.35 C12.2 131.4,27.35 v2(132,26.75) ; v1(121.25,28.75) IC6.7 ; v1(125.25,40.75) 125.75,40.25 C24.1 C23.1 v1(125.5,42.25) 125.5,43.161 125.589,43.25 127,43.25 127.25,43.5 127.25,44.5 127.24,44.49 IC1.1 ; IC2.16 IC2.17 ; IC2.18 IC2.17 ; v1(127.215,63.885) 127.215,62.16 IC1.40 ; v2(128,34) 127.865,34 127.635,33.77 IC2.17 ; C18.2 130.75,38 v1(131.75,37) 131.75,36.9 130.2,35.35 C16.2 130.2,35.15 130.7,34.65 C15.2 130.7,32.5 C14.2 C13.2@130.45,30.5 ; v1(129.75,52) 131.065,52 IC1.42 ; C13.2@130.55,30.3 C13.2 ; C25.1 132.567,40.85 132.917,40.5 v1(133,40.5) ; IC1.49 IC1.42 ; v1(132.5,49.25) 132.5,49.317 132.59,49.407 IC1.44 ; v1(132.5,54.75) 132.5,54.683 132.59,54.593 IC1.48 ; IC1.41 IC1.48 ; LED4.1 v1(137.25,32.25) 137.25,31.53 136.17,30.45 C2.1 ; LED5.1 v1(137.5,38) 137.5,37.325 136.519,36.344 136.519,36.249 136.22,35.95 C4.2 ; v1(135.75,52) 134.115,52 IC1.46 ; v1(140,39) 140.067,39 140.317,38.75 LED6.1 ; IC4.2 142,30 142.45,30.45 C1.2 144.2,30.45 v1(144.75,31) ; IC5.2 141.911,35.5 142,35.589 142,35.75 142.2,35.95 C3.2 143.175,35.9 v1(144.837,35.9) ; LED7.1 150.25,38.25 v1(150.75,38.75) ; J3.2 154.125,31.125 v1(154.5,31.5) ; IC3.29 157,52 IC3.3 ; RV5.1@158.85,35.9 158.85,35.222 159.372,34.7 161.85,34.7 ; C21.1@161.1,36 161.1,35.45 161.85,34.7 ; v1(161.5,57.5) 161.5,57.412 161.75,57.162 161.75,53.5 162.187,53.063 162.313,53.063 162.75,53.5 LED2.1 164.95,54.35 C26.1 ; RV6.1 161.75,40.021 162.271,39.5 163.75,39.5 ; C22.1 163.25,40 163.75,39.5 ; v1(165.5,30.25) 165.5,30.317 165.25,30.567 RV4.1 166.555,31.7 166.905,32.05 C8.1 C7.1 170.025,32.05 ; SW1.1 SW1.1@166.825,35.975 ; SW2.1 168.65,41 169.099,40.551 169.099,40.501 169.5,40.1 169.5,39.75 169.25,39.5 168.456,39.5 ; v1(168.75,30) 170.25,30 ; v1(169.575,35.744) 169.581,35.75 170.317,35.75 170.567,35.5 J2.A12 173.5,35.5 174.25,34.75 174.25,31.5 172.75,30 J2.B12 170.25,30 ; J2.B5 J2.A5 171.3,32.05 170.025,32.05 ; IC1.42 IC1.43 IC1.44 ; IC1.44 IC1.45 IC1.46 ; IC1.48 IC1.47 IC1.46 ; 161.85,34.7 167.511,34.7 167.6,34.789 167.6,35.15 167.274,35.476 167.274,35.526 SW1.1@166.825,35.975 ; 163.75,39.5 168.456,39.5 ; SW1.1@166.825,35.975 167.875,35.975 168.85,36.95 168.85,37.9 v1(168.5,38.25) 168.456,38.294 168.456,39.5 ; 170.025,32.05 170.025,30.225 170.25,30
  L1 (Signal) w0.3: C10.1 152.45,34.875 ; v1(152,60.75) 152,59.576 152.3,59.276 152.3,59.151 152.475,58.976 R7.1 ; v1(152.5,37) 152.5,34.925 152.45,34.875 ; C9.1 152.45,34.875 ; R5.1 157.805,58.6 158.155,58.25 C20.1 158.475,58.025 158.805,58.025 158.83,58 160.892,58 161.392,57.5 v1(161.5,57.5) ; IC3.3 159.75,52 v1(160.75,51) ; RV2.1 169.15,49.725 167.5,48.075 167.5,47 168,46.5 168.25,46.25 170.65,46.25 RV1.1 RV1.1@170.775,46.15 ; v1(170.75,56) RV3.1 172.965,54.1 173.62,53.445 J1.MP4 ; v1(172.25,45) 172.173,45.077 171.848,45.077 RV1.1@170.775,46.15 ; J1.5 173.35,53.025 J1.MP4 ; RV1.1@170.775,46.15 172.5,47.875 172.5,48.629 172.676,48.805 J1.MP3 174.805,48.805 175.2,49.2 175.2,49.275 175.925,50 J1.MP1 176,52.175 175.2,52.975 175.2,53.05 175,53.25 175,53.324 174.824,53.5 173.825,53.5 J1.MP4
  other v2: 141.5,27 166.75,28 124.5,28.25 140,32.5 156.5,34.25 123.75,38.25 138.5,39 156.5,40 119.25,41.5 116.25,42.5 175.25,43.75 147.5,46.75 166,48.5 149.5,58.25 172.5,58.25 162.75,62 150.25,62.75 117.25,63.25
GPIO0: C21.2 IC1.27 Q2.3 RV5.2 SW1.4 | length 44.3
  L1 (Signal) w0.152: IC1.27 143.75,62.435 144.66,63.345 145.935,63.345 146.75,62.53 146.75,57.25 149.5,54.5 149.5,41.25 150.75,40 153.75,40 154,40.25 ; Q2.3 154,42.355 154,40.25 ; SW1.4 163.4,37.4 RV5.2 156.85,37.4 154,40.25
GPIO5: IC1.5 pad.5 | length 64.1
  L1 (Signal) w0.152: IC1.5 132.32,43.18 135.5,40 v3(136.5,40) ; v1(173,60) 173,60.067 174.966,62.033 pad.5
  L4 (Signal) w0.152: v3(136.5,40) 141.75,40 144.9,36.85 149.088,36.85 149.688,36.25 155.5,36.25 159.76,40.51 162.61,40.51 164.75,42.65 164.75,53.25 171.25,59.75 172.75,59.75 v1(173,60)
GPIO7: IC1.7 pad.4 | length 57.8
  L1 (Signal) w0.152: IC1.7 134.86,42.226 135,42.086 135,42.067 135.817,41.25 v3(136.75,41.25) ; v1(170.25,60.25) 170.25,60.317 171.966,62.033 pad.4
  L4 (Signal) w0.152: v3(136.75,41.25) 137.25,40.75 142.75,40.75 145.78,37.72 151.47,37.72 155.575,41.825 161.275,41.825 163.55,44.1 163.55,52.55 164.039,53.039 164.039,55.039 169.25,60.25 v1(170.25,60.25)
GPIO13: IC1.21 R18.1 | length 20.2
  L1 (Signal) w0.152: R18.1 143.55,42 145,42 145.5,42.5 v1(147.25,42.5) ; IC1.21 145.02,54 v1(148,54)
  L4 (Signal) w0.152: v1(147.25,42.5) 147.5,42.5 148.75,43.75 148.75,49.75 149,50 149,53.75 148.75,54 v1(148,54)
GPIO14: IC1.22 R19.1 | length 20.8
  L1 (Signal) w0.152: IC1.22 147.684,55.29 147.974,55 v1(148,55) ; R19.1 146.574,41.674 147.857,41.674 148.155,41.972 148.155,42.155 v1(148.5,42.5)
  L4 (Signal) w0.152: v1(148,55) 149.411,55 149.5,54.911 149.5,42.75 149.25,42.5 v1(148.5,42.5)
GPIO16: IC1.9 pad.3 | length 50.5
  L1 (Signal) w0.152: IC1.9 137.4,42.417 137.731,42.086 138.164,42.086 v3(138.25,42) ; v1(167.75,60.25) 167.75,61.25 pad.3
  L4 (Signal) w0.152: v3(138.25,42) 138.75,41.5 144.25,41.5 146.1,39.65 151.697,39.65 155.122,43.075 159.325,43.075 162.25,46 162.25,53.111 163.25,54.111 163.25,57 166.5,60.25 v1(167.75,60.25)
GPIO18: IC1.11 pad.2 | length 45.4
  L1 (Signal) w0.152: IC1.11 140,44.575 v1(140,42.53) ; v1(165.25,60.5) 165.988,61.238 165.988,61.988 pad.2
  L4 (Signal) w0.152: v1(140,42.53) 140.03,42.5 145.5,42.5 146.625,41.375 150.625,41.375 153.39,44.14 153.39,44.713 153.479,44.802 158.612,44.802 160.5,46.69 160.5,49.676 160.07,50.106 160.07,57.82 162.75,60.5 v1(165.25,60.5)
INT: IC2.7 IC6.4 | length 11.4
  L1 (Signal) w0.152: IC6.4 119.3,29.2 120.5,28 122.411,28 122.5,28.089 122.5,32.671 122.589,32.76 IC2.7
INT_OUT: IC1.20 IC6.11 | length 42.7
  L1 (Signal) w0.152: IC6.11 119.275,36.151 119.275,37.525 v1(120,38.25) ; IC1.20 v1(148,52.75)
  L4 (Signal) w0.152: v1(120,38.25) 119.299,38.951 119.655,40.405 120.75,41.5 130.832,41.5 131.232,41.9 131.232,44.232 139.75,52.75 v1(148,52.75)
NetC17_1: C17.1 IC2.21 | length 3.3
  L1 (Signal) w0.152: C17.1 125.254,37.996 125.254,37.041 125.795,36.5 126.661,36.5 126.75,36.411 IC2.21
NetC17_2: C17.2 IC2.20 | length 4.1
  L1 (Signal) w0.152: C17.2 126.75,37.9 126.75,37.089 126.839,37 127.266,37 127.571,36.695 127.571,35.374 127.481,35.285 IC2.20
NetC18_1: C18.1 IC2.19 | length 4.3
  L1 (Signal) w0.152: IC2.19 127.761,34.78 127.85,34.869 C18.1
NetC20_2: C20.2 IC3.8 R4.2 R5.2 | length 9.2
  L1 (Signal) w0.3: R4.2 155.55,60 155.318,59.768 155.318,57.736 155.604,57.45 R5.2 156.843,57.45 157.25,57.043 157.25,56.926 ; IC3.8 158,55.76 157.25,56.51 157.25,56.926 ; C20.2 158.174,56.926 157.25,56.926
NetIC3_9: IC3.9 R6.2 | length 5.1
  L1 (Signal) w0.3: R6.2 154.125,57.826 155.378,56.573 156.422,56.573 157.5,55.495 IC3.9
NetIC3_11: IC3.11 R7.2 | length 5.5
  L1 (Signal) w0.3: R7.2 152.725,57.826 154.478,56.073 155.922,56.073 156.5,55.495 IC3.11
NetIC7_1: IC7.1 R12.2 | length 7.6
  L1 (Signal) w0.152: v1(155.125,28.9) 155.125,28.375 155.75,27.75 R12.2 ; v1(157,31.25) 158.85,31.25 IC7.1
  L4 (Signal) w0.152: v1(155.125,28.9) 155.125,30.125 156.25,31.25 v1(157,31.25)
NetIC7_2: IC7.2 R11.2 | length 7.8
  L1 (Signal) w0.152: R11.2 156.65,33.15 156,32.5 156,31 156.5,30.5 158.85,30.5 IC7.2
NetIC7_5: IC7.5 R11.1 | length 5.6
  L1 (Signal) w0.152: R11.1 160.125,33.25 162.25,33.25 162.75,32.75 162.75,31.5 162.6,31.35 IC7.5
NetLED1_1: LED1.1 R12.1 | length 2.7
  L1 (Signal) w0.152: R12.1 LED1.1
NetLED2_2: LED2.2 R20.2 | length 2.7
  L1 (Signal) w0.152: LED2.2 162.75,56.266 163.024,56.539 163.45,56.539 163.989,56 R20.2
NetLED4_2: LED4.2 R16.2 | length 2.1
  L1 (Signal) w0.152: LED4.2 133.25,32.15 133.25,31.25 133.601,30.899 133.601,30.824 133.925,30.5 R16.2
NetLED5_2: LED5.2 R17.2 | length 1.7
  L1 (Signal) w0.152: LED5.2 134,37.925 R17.2
NetLED6_2: LED6.2 R18.2 | length 1.7
  L1 (Signal) w0.152: LED6.2 R18.2
NetLED7_2: LED7.2 R19.2 | length 1.6
  L1 (Signal) w0.152: R19.2 146.25,38.425 LED7.2
NetQ1_1: Q1.1 R8.1 | length 3.2
  L1 (Signal) w0.152: R8.1 158.125,47.1 158.374,46.851 158.374,46.726 159.455,45.645 Q1.1
NetQ2_1: Q2.1 R9.1 | length 2.8
  L1 (Signal) w0.152: Q2.1 154.927,44.573 154.927,46.851 155.176,47.1 R9.1
RTS: IC3.24 Q1.2 R9.2 | length 7.9
  L1 (Signal) w0.152: IC3.24 155.926,50.076 155.926,49.639 155.687,49.4 155.078,49.4 154.989,49.311 154.989,48.499 155.238,48.25 R9.2 156,48.25 156.25,48 156.25,46.603 157.428,45.425 157.428,44.667 Q1.2
SCL: IC2.9 IC6.2 | length 13
  L1 (Signal) w0.152: IC6.2 118,28.75 119.779,26.971 122.721,26.971 123.35,27.6 123.35,31.661 123.439,31.75 IC2.9
SCL_OUT: IC1.18 IC6.13 | length 44.5
  L1 (Signal) w0.152: IC6.13 118,38.547 118.405,38.951 118.405,39.155 v1(118.5,39.25) ; IC1.18 145.04,50.25 v1(148,50.25)
  L4 (Signal) w0.152: v1(118.5,39.25) 118.608,38.142 118.646,38.104 119.371,37.379 119.42,37.33 120.007,37.33 121.927,39.25 124.265,39.25 124.515,39 128.5,39 128.855,39.355 128.9,39.4 130.746,39.405 cw(c130.75,38.75) 130.751,39.405 133.024,39.4 133.15,39.4 133.195,39.445 134,40.25 134,43.253 140.997,50.25 v1(148,50.25)
SDA: IC2.8 IC6.3 | length 12.2
  L1 (Signal) w0.152: IC6.3 118.65,28.85 119.25,28.25 120,27.5 122.653,27.5 123,27.847 123,32 123.255,32.255 IC2.8
SDA_OUT: IC1.19 IC6.12 | length 41.8
  L1 (Signal) w0.152: IC6.12 118.65,37.9 v1(120.5,39.75) ; IC1.19 145.02,51.5 v1(148,51.5)
  L4 (Signal) w0.152: v1(120.5,39.75) 120.5,39.859 120.891,40.25 124.36,40.25 124.98,39.63 127.91,39.63 128.38,40.1 131.1,40.1 132.32,41.32 132.32,43.82 140,51.5 v1(148,51.5)
U0RXD: IC1.36 IC3.26 | length 40.9
  L1 (Signal) w0.152: IC1.36 132.398,62.213 132.398,63.796 132.487,63.885 146.365,63.885 150.5,59.75 150.5,58.25 151.5,57.25 151.5,48.75 v1(152,48.25) ; IC3.26 157.074,50.076 157.074,49.08 v1(157.154,49)
  L4 (Signal) w0.152: v1(152,48.25) 153.909,48.25 154.159,48 156.713,48 157.154,48.441 v1(157.154,49)
U0TXD: IC1.37 IC3.25 | length 39.3
  L1 (Signal) w0.152: IC1.37 131.148,62.233 v1(131.148,63.845) ; v1(147.75,59) 147.75,58.5 150.25,56 v1(150.25,50.5) ; v1(156.107,48.896) 156.107,49 156.5,49.394 IC3.25
  L4 (Signal) w0.152: v1(131.148,63.845) 131.189,63.885 145.395,63.885 147.75,61.53 v1(147.75,59) ; v1(150.25,50.5) 151.845,48.905 156.098,48.905 v1(156.107,48.896)
USB_D_N: IC3.5 J1.2 RV2.2 | length 17.8
  L1 (Signal) w0.3: IC3.5 161.074,53 161.25,52.824 161.25,52.5 161.75,52 163.5,52 164,51.5 v1(165.75,51.5) ; v1(167.5,50.25) 168,50.75 171.8,50.75 172.075,50.475 ; RV2.2 170.75,49.775 171.075,50.1 171.7,50.1 172.075,50.475 ; J1.2 172.075,50.475
  L4 (Signal) w0.3: v1(165.75,51.5) 165.827,51.423 166.327,51.423 v1(167.5,50.25)
USB_D_P: IC3.4 J1.3 RV3.2 | length 17.2
  L1 (Signal) w0.3: IC3.4 160.5,52.5 161.5,51.5 163,51.5 163.75,50.75 166.25,50.75 166.944,51.444 171.831,51.444 ; RV3.2 170.775,52.5 171.831,51.444 ; J1.3 172.15,51.125 171.831,51.444
VBUS: C26.2 J1.1 R4.1 R20.1 RV1.2 | length 31.4
  L1 (Signal) w0.3: R4.1 160.25,60 162.575,57.675 167.999,57.675 168.45,57.224 168.45,55.275 ; C26.2 166.5,54.3 166.5,55.95 R20.1 167.725,56 168.45,55.275 ; v1(169,47.75) RV1.2 170.775,47.75 172.85,49.825 J1.1 ; v1(169.25,55.25) 169.225,55.275 168.45,55.275
  L4 (Signal) w0.3: v1(169,47.75) 169,47.858 169.25,48.108 v1(169.25,55.25)
pads on no net: IC1.4 IC1.6 IC1.8 IC1.10 IC1.12 IC1.13 IC1.14 IC1.15 IC1.16 IC1.17 IC1.23 IC1.24 IC1.25 IC1.26 IC1.28 IC1.29 IC1.30 IC1.31 IC1.32 IC1.33 IC1.34 IC1.35 IC1.38 IC1.39 IC2.1 IC2.2 IC2.3 IC2.4 IC2.5 IC2.6 IC2.10 IC2.11 IC2.12 IC2.22 IC3.1 IC3.2 IC3.10 IC3.12 IC3.13 IC3.14 IC3.15 IC3.16 IC3.17 IC3.18 IC3.19 IC3.20 IC3.21 IC3.22 IC3.23 IC3.27 IC4.4 IC5.4 IC6.5 IC6.6 IC6.9 IC6.10 J1.4 J2.MH1 J2.MH2 J2.MH3 J2.MH4 J3.3 J3.4 SW1.2 SW1.3 SW2.2 SW2.3

## Polygon pours and split planes (outlines as drawn)
GND on L2 (GND) "GND_L02_P008" (solid, remove dead copper, pour order 8): 175.75,64.5 cw(c175.75,63.25) 177,63.25 177,26.25 cw(c176.396,26.854) 176.396,26 117.79,26 cw(c117.79,28.54) 115.25,28.54 115.25,43.75 127.25,43.75 127.25,61.96 115.25,61.96 cw(c117.79,61.96) 117.79,64.5 119.5,64.5
+3.3V on L3(3.3V) "+3.3V_L03_P014" (solid, remove dead copper, pour order 14): 175.75,64.5 cw(c175.75,63.25) 177,63.25 177,26.25 cw(c176.396,26.854) 176.396,26 117.79,26 cw(c117.79,28.54) 115.25,28.54 115.25,43.75 127.25,43.75 127.25,61.96 115.25,61.96 cw(c117.79,61.96) 117.79,64.5 119.5,64.5
GND on L4 (Signal) "GND_L04_P023" (solid, remove dead copper, pour order 23): 175.75,64.5 cw(c175.75,63.25) 177,63.25 177,26.25 cw(c176.396,26.854) 176.396,26 117.79,26 cw(c117.79,28.54) 115.25,28.54 115.25,43.75 127.25,43.75 127.25,61.96 115.25,61.96 cw(c117.79,61.96) 117.79,64.5 119.5,64.5
GND on L1 (Signal) "GND_L01_P022" (solid, remove dead copper, pour order 22): 175.75,64.5 cw(c175.75,63.25) 177,63.25 177,26.25 cw(c176.396,26.854) 176.396,26 117.79,26 cw(c117.79,28.54) 115.25,28.54 115.25,43.75 127.25,43.75 127.25,61.96 115.25,61.96 cw(c117.79,61.96) 117.79,64.5 119.5,64.5

## Silkscreen, mask and mechanical layers (free items; w line width, h text height)
Mechanical 1:
  lines w0.254: 114.5,28.77 ccw(c117.566,28.77) 115.398,26.602 115.702,26.298 ccw(c117.87,28.466) 117.87,25.4 176.65,25.4 176.884,25.4 ccw(c176.884,26.151) 177.415,25.62 ccw(c176.485,26.55) 177.8,26.55 177.8,63.172 ccw(c175.922,63.172) 177.25,64.5 ccw(c175.439,62.689) 175.439,65.25 117.77,65.25 ccw(c117.77,62.184) 115.602,64.352 115.398,64.148 ccw(c117.566,61.98) 114.5,61.98 114.5,42.5 114.5,28.77